# EAGLE board nutzen_04_mil (EAGLE 9.6.2), part 1 of 3
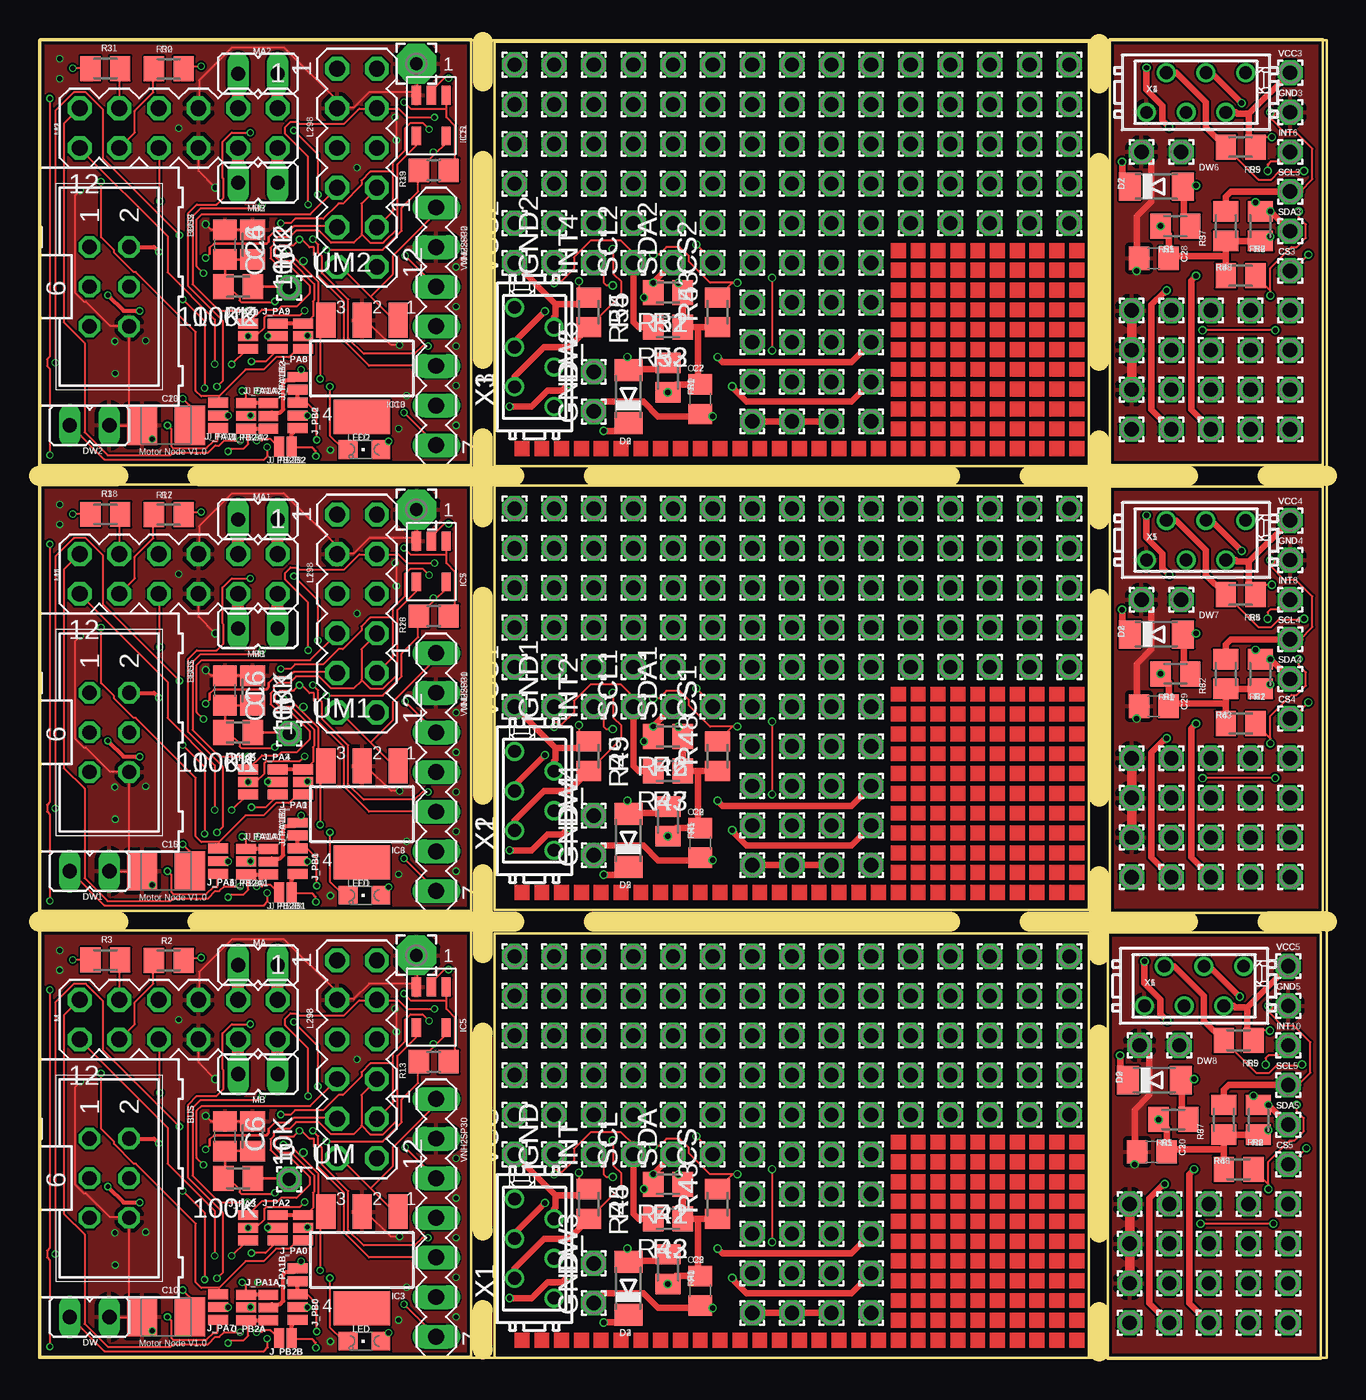
[diagram p0: board, top side]
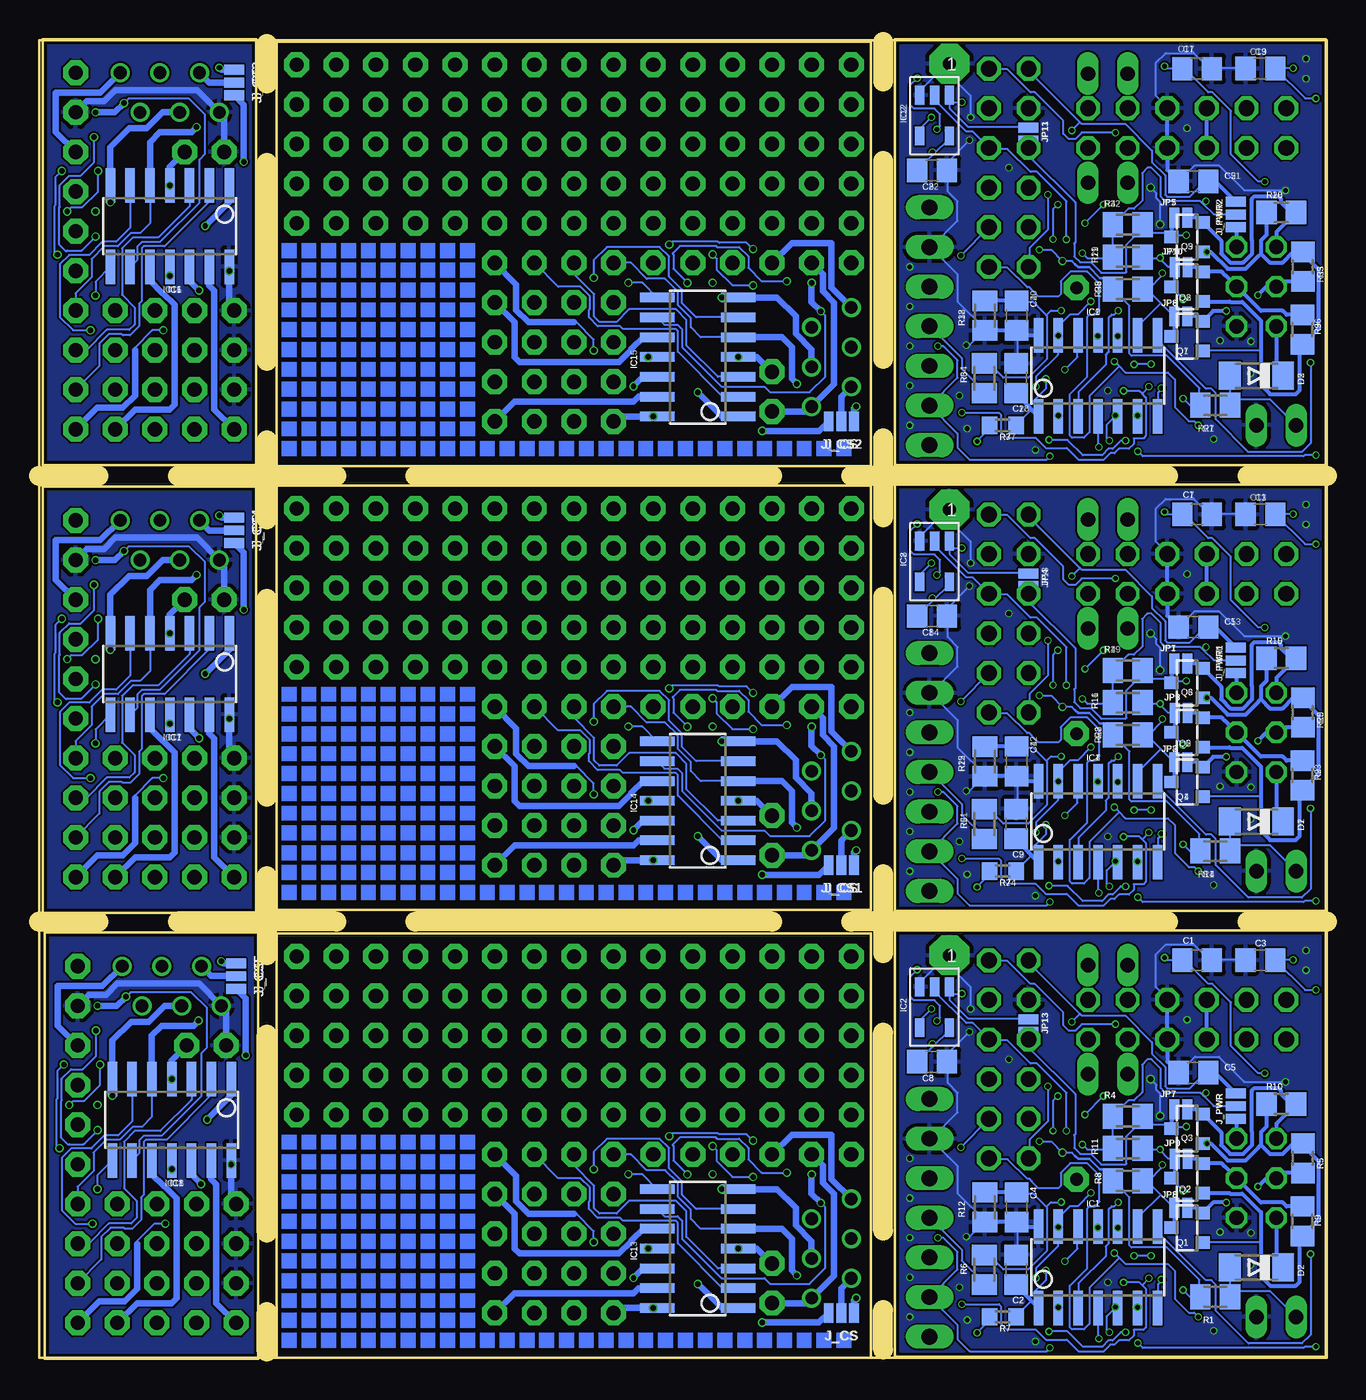
[diagram p1: board, bottom side, seen from below]

Size 82.55 x 84.58 mm. Coordinates in mm from the lower left corner, seen from the top.
Outline: 0.06,0.13 27.67,0.13 27.67,27.42 0.06,27.42 0.06,0.13
Outline: 0.06,0.13 27.69,0.13 27.69,27.43 0.06,27.43 0.06,0.13
Outline: 0.06,28.7 27.67,28.7 27.67,56 0.06,56 0.06,28.7
Outline: 0.06,28.7 27.69,28.7 27.69,56.01 0.06,56.01 0.06,28.7
Outline: 0.06,57.28 27.67,57.28 27.67,84.57 0.06,84.57 0.06,57.28
Outline: 0.06,57.28 27.69,57.28 27.69,84.58 0.06,84.58 0.06,57.28
Outline: 67.31,0.06 67.31,27.24 29.21,27.24 29.21,0.06 67.31,0.06
Outline: 67.31,28.77 67.31,55.94 29.21,55.94 29.21,28.77 67.31,28.77
Outline: 67.31,57.21 67.31,84.39 29.21,84.39 29.21,57.21 67.31,57.21
Outline: 68.64,57.28 82.3,57.28 82.3,84.58 68.64,84.58 68.64,57.28
Outline: 68.64,28.58 82.3,28.58 82.3,55.88 68.64,55.88 68.64,28.58
Outline: 68.52,0 82.17,0 82.17,27.3 68.52,27.3 68.52,0
Outline: 0,0.06 82.55,0.06 82.55,84.52 0,84.52 0,0.06
Copper layers (1*16): Top 0.035559375mm / dielectric 1.6mm / Bottom 0.035559375mm
Design rules "jlcpcb2layer": minimum track width 5mil, minimum drill 12mil, track to track 5mil, track to pad 5mil, pad to pad 5mil, via to via 5mil, smd to smd 5mil, copper to edge 8mil, drill to drill 6mil, minimum pad ring 5mil, minimum via ring 3mil, stop-mask expansion 2.5mil, vias tented up to drill 0mil, thermal gap 10mil
Net classes: 2 power: width 0.762 mm, drill 0.762 mm
Milling: 24 lines

## Footprints (pad centres in the part's own frame; a part is rotated, then mirrored left to right if it is on the bottom)
M0805 = smd 1.3 x 1.6: 1 -0.95,0; 2 0.95,0
ML6 = drill 0.914 octagon: 1 -2.54,-1.27; 2 -2.54,1.27; 3 0,-1.27; 4 0,1.27; 5 2.54,-1.27; 6 2.54,1.27
C0805 = smd 1.3 x 1.5: 1 -0.95,0; 2 0.95,0
B/3528-21R = smd 1.95 x 2.5: + 1.525,0; - -1.525,0
1,6/0,9 = drill 0.914 pad 1.6 octagon: 1 0,0
MINIMELF = smd 1.4 x 1.8: A 1.7,0; C -1.7,0
JP1 = drill 0.914 long: 1 0,-1.27; 2 0,1.27
SOIC14 = smd 0.61 x 2.21: 1 -3.81,-2.603; 2 -2.54,-2.603; 3 -1.27,-2.603; 4 0,-2.603; 5 1.27,-2.603; 6 2.54,-2.603; 7 3.81,-2.603; 8 3.81,2.603; 9 2.54,2.603; 10 1.27,2.603; 11 0,2.603; 12 -1.27,2.603; 13 -2.54,2.603; 14 -3.81,2.603
SOT-23/5 = smd 0.6 x 1.2: 1 -0.95,-1.306; 2 0,-1.306; 3 0.95,-1.306; 4 0.95,1.306; 5 -0.95,1.306
SOT223 = smd 1.219 x 2.235: 1 -2.311,-3.099; 2 0,-3.099; 3 2.311,-3.099 | smd 3.6 x 2.2: 4 0,3.099
SMT-JUMPER_3_1-NC_PASTE_NO-SILK = smd 0.635 x 1.27: 1 -0.813,0; 2 0,0; 3 0.813,0
SMT-JUMPER_2_NO_NO-SILK = smd 0.635 x 1.27: 1 -0.406,0; 2 0.406,0
SMT-JUMPER_2_NC_PASTE_NO-SILK = smd 0.635 x 1.27: 1 -0.406,0; 2 0.406,0
MA06-2 = drill 1.016 octagon: 1 -6.35,-1.27; 2 -6.35,1.27; 3 -3.81,-1.27; 4 -3.81,1.27; 5 -1.27,-1.27; 6 -1.27,1.27; 7 1.27,-1.27; 8 1.27,1.27; 9 3.81,-1.27; 10 3.81,1.27; 11 6.35,-1.27; 12 6.35,1.27
CHIPLED_0805 = smd 1.2 x 1.2: A 0,-1.05; C 0,1.05
1,6/0,8 = drill 0.813 pad 1.6 octagon: 1 0,0
2,54/0,8 = drill 0.813 pad 2.54 octagon: 1 0,0
SOT23 = smd 0.8 x 0.9: 1 -0.95,-1; 2 0.95,-1; 3 0,1
R0805 = smd 1.3 x 1.5: 1 -0.95,0; 2 0.95,0
R0603 = smd 1 x 1.1: 1 -0.85,0; 2 0.85,0
MA07-1 = drill 1.016 long: 1 -7.62,0; 2 -5.08,0; 3 -2.54,0; 4 0,0; 5 2.54,0; 6 5.08,0; 7 7.62,0
MICROMATCH-6 = drill 0.813: 1 3.175,1.27; 2 1.905,-1.27; 3 0.635,1.27; 4 -0.635,-1.27; 5 -1.905,1.27; 6 -3.175,-1.27

## Placement (x,y rotation side)
10K  10k  [M0805]  13.7,14.25 270 top
10K1  10k  [M0805]  13.7,42.82 270 top
10K2  10k  [M0805]  13.7,71.4 270 top
100K  10k  [M0805]  12.76,11.56 180 top
100K1  10k  [M0805]  12.76,40.13 180 top
100K2  10k  [M0805]  12.76,68.71 180 top
BUS  [ML6]  4.51,11.56 270 top
BUS1  [ML6]  4.51,40.13 270 top
BUS2  [ML6]  4.51,68.71 270 top
C1  1n  [C0805]  8.32,25.53 180 bottom
C2  100n  [C0805]  19.91,5.69 90 bottom
C3  1n  [C0805]  4.25,25.53 180 bottom
C4  100n  [C0805]  19.89,9.7 90 bottom
C5  0.1  [C0805]  8.55,18.31 180 bottom
C6  100n  [C0805]  11.93,14.25 270 top
C7  1n  [C0805]  8.32,54.1 180 bottom
C8  0.1  [C0805]  25.3,19.02 0 bottom
C9  100n  [C0805]  19.91,34.26 90 bottom
C10  100uF/6V  [B/3528-21R]  8.14,2.67 0 top
C11  1n  [C0805]  4.25,54.11 180 bottom
C12  100n  [C0805]  19.89,38.28 90 bottom
C13  0.1  [C0805]  8.55,46.89 180 bottom
C14  0.1  [C0805]  25.3,47.59 0 bottom
C15  100uF/6V  [B/3528-21R]  8.14,31.24 0 top
C16  100n  [C0805]  11.93,42.82 270 top
C17  1n  [C0805]  8.32,82.68 180 bottom
C18  100n  [C0805]  19.91,62.84 90 bottom
C19  1n  [C0805]  4.25,82.68 180 bottom
C20  100n  [C0805]  19.89,66.85 90 bottom
C21  0.1  [C0805]  8.55,75.46 180 bottom
C22  0.1  [C0805]  25.3,76.17 0 bottom
C23  100uF/6V  [B/3528-21R]  8.14,59.82 0 top
C24  100n  [C0805]  11.93,71.4 270 top
C25  100n  [C0805]  42.38,4.34 270 top
C26  100n  [C0805]  42.38,33.05 270 top
C27  100n  [C0805]  42.38,61.49 270 top
C28  100n  [C0805]  71.46,70.52 180 top
C29  100n  [C0805]  71.46,41.82 180 top
C30  100n  [C0805]  71.34,13.25 180 top
CS  [1,6/0,9]  43.18,13.08 90 top
CS1  [1,6/0,9]  43.18,41.78 90 top
CS2  [1,6/0,9]  43.18,70.23 90 top
CS3  [1,6/0,9]  80.2,69.72 0 top
CS4  [1,6/0,9]  80.2,41.02 0 top
CS5  [1,6/0,9]  80.07,12.45 0 top
D1  [MINIMELF]  4.51,34.42 180 bottom
D2  [MINIMELF]  4.51,5.84 180 bottom
D3  [MINIMELF]  4.51,62.99 180 bottom
D4  [MINIMELF]  37.78,4.51 90 top
D5  [MINIMELF]  37.78,33.21 90 top
D6  [MINIMELF]  37.78,61.66 90 top
D7  [MINIMELF]  71.63,75.12 0 top
D8  [MINIMELF]  71.63,46.42 0 top
D9  [MINIMELF]  71.5,17.84 0 top
DW  [JP1]  3.24,2.67 270 top
DW1  [JP1]  3.24,31.24 270 top
DW2  [JP1]  3.24,59.82 270 top
DW3  [1,6/0,9]  35.56,6.1 90 top
DW4  [1,6/0,9]  35.56,34.8 90 top
DW5  [1,6/0,9]  35.56,63.25 90 top
DW6  [1,6/0,9]  73.22,77.34 0 top
DW7  [1,6/0,9]  73.22,48.64 0 top
DW8  [1,6/0,9]  73.09,20.07 0 top
GND  [1,6/0,9]  33.02,13.08 90 top
GND1  [1,6/0,9]  33.02,41.78 90 top
GND2  [1,6/0,9]  33.02,70.23 90 top
GND3  [1,6/0,9]  80.2,79.88 0 top
GND4  [1,6/0,9]  80.2,51.18 0 top
GND5  [1,6/0,9]  80.07,22.61 0 top
GND_  [1,6/0,9]  35.56,3.56 90 top
GND_1  [1,6/0,9]  35.56,32.26 90 top
GND_2  [1,6/0,9]  35.56,60.71 90 top
GND_3  [1,6/0,9]  70.68,77.34 0 top
GND_4  [1,6/0,9]  70.68,48.64 0 top
GND_5  [1,6/0,9]  70.55,20.07 0 top
IC1  TINY84 or TINY841  [SOIC14]  14.67,5.84 0 bottom
IC2  [SOT-23/5]  25.15,22.52 180 bottom
IC3  MCP1703DB  [SOT223]  20.7,6.32 180 top
IC4  TINY84 or TINY841  [SOIC14]  14.67,34.42 0 bottom
IC5  [SOT-23/5]  25.15,22.52 180 top
IC6  MCP1703DB  [SOT223]  20.7,34.89 180 top
IC7  [SOT-23/5]  25.15,51.09 180 top
IC8  [SOT-23/5]  25.15,51.09 180 bottom
IC9  TINY84 or TINY841  [SOIC14]  14.67,62.99 0 bottom
IC10  MCP1703DB  [SOT223]  20.7,63.47 180 top
IC11  [SOT-23/5]  25.15,79.67 180 top
IC12  [SOT-23/5]  25.15,79.67 180 bottom
IC13  TINY84 or TINY841  [SOIC14]  40.32,7.05 90 bottom
IC14  TINY84 or TINY841  [SOIC14]  40.32,35.75 90 bottom
IC15  TINY84 or TINY841  [SOIC14]  40.32,64.2 90 bottom
IC16  TINY84 or TINY841  [SOIC14]  74.17,72.58 180 bottom
IC17  TINY84 or TINY841  [SOIC14]  74.17,43.88 180 bottom
IC18  TINY84 or TINY841  [SOIC14]  74.04,15.3 180 bottom
INT  [1,6/0,9]  35.56,13.08 90 top
INT0  [1,6/0,9]  45.72,13.08 90 top
INT1  [1,6/0,9]  45.72,41.78 90 top
INT2  [1,6/0,9]  35.56,41.78 90 top
INT3  [1,6/0,9]  45.72,70.23 90 top
INT4  [1,6/0,9]  35.56,70.23 90 top
INT5  [1,6/0,9]  80.2,67.18 0 top
INT6  [1,6/0,9]  80.2,77.34 0 top
INT7  [1,6/0,9]  80.2,38.48 0 top
INT8  [1,6/0,9]  80.2,48.64 0 top
INT9  [1,6/0,9]  80.07,9.91 0 top
INT10  [1,6/0,9]  80.07,20.07 0 top
J_CS  [SMT-JUMPER_3_1-NC_PASTE_NO-SILK]  31.11,2.92 180 bottom
J_CS1  [SMT-JUMPER_3_1-NC_PASTE_NO-SILK]  31.11,31.62 180 bottom
J_CS2  [SMT-JUMPER_3_1-NC_PASTE_NO-SILK]  31.11,60.07 180 bottom
J_CS3  [SMT-JUMPER_3_1-NC_PASTE_NO-SILK]  70.04,81.79 270 bottom
J_CS4  [SMT-JUMPER_3_1-NC_PASTE_NO-SILK]  70.04,53.09 270 bottom
J_CS5  [SMT-JUMPER_3_1-NC_PASTE_NO-SILK]  69.91,24.51 270 bottom
J_PA0  [SMT-JUMPER_3_1-NC_PASTE_NO-SILK]  16.93,8.38 270 top
J_PA1  [SMT-JUMPER_3_1-NC_PASTE_NO-SILK]  16.93,36.96 270 top
J_PA1A  [SMT-JUMPER_3_1-NC_PASTE_NO-SILK]  14.71,3.27 270 top
J_PA1A1  [SMT-JUMPER_3_1-NC_PASTE_NO-SILK]  14.71,31.85 270 top
J_PA1A2  [SMT-JUMPER_3_1-NC_PASTE_NO-SILK]  14.71,60.42 270 top
J_PA1B  [SMT-JUMPER_2_NO_NO-SILK]  16.57,5.37 270 top
J_PA1B1  [SMT-JUMPER_2_NO_NO-SILK]  16.57,33.94 270 top
J_PA1B2  [SMT-JUMPER_2_NO_NO-SILK]  16.57,62.52 270 top
J_PA2  [SMT-JUMPER_3_1-NC_PASTE_NO-SILK]  15.3,8.38 90 top
J_PA3  [SMT-JUMPER_3_1-NC_PASTE_NO-SILK]  13.4,8.38 90 top
J_PA4  [SMT-JUMPER_3_1-NC_PASTE_NO-SILK]  15.3,36.96 90 top
J_PA5  [SMT-JUMPER_3_1-NC_PASTE_NO-SILK]  13.4,36.96 90 top
J_PA6  [SMT-JUMPER_3_1-NC_PASTE_NO-SILK]  11.49,31.88 270 top
J_PA7  [SMT-JUMPER_3_1-NC_PASTE_NO-SILK]  11.49,3.3 270 top
J_PA8  [SMT-JUMPER_3_1-NC_PASTE_NO-SILK]  16.93,65.53 270 top
J_PA9  [SMT-JUMPER_3_1-NC_PASTE_NO-SILK]  15.3,65.53 90 top
J_PA10  [SMT-JUMPER_3_1-NC_PASTE_NO-SILK]  13.4,65.53 90 top
J_PA11  [SMT-JUMPER_3_1-NC_PASTE_NO-SILK]  11.49,60.45 270 top
J_PB0  [SMT-JUMPER_3_1-NC_PASTE_NO-SILK]  16.57,3.3 270 top
J_PB1  [SMT-JUMPER_3_1-NC_PASTE_NO-SILK]  16.57,31.88 270 top
J_PB2  [SMT-JUMPER_3_1-NC_PASTE_NO-SILK]  16.57,60.45 270 top
J_PB2A  [SMT-JUMPER_3_1-NC_PASTE_NO-SILK]  13.27,3.28 90 top
J_PB2A1  [SMT-JUMPER_3_1-NC_PASTE_NO-SILK]  13.27,31.85 90 top
J_PB2A2  [SMT-JUMPER_3_1-NC_PASTE_NO-SILK]  13.27,60.43 90 top
J_PB2B  [SMT-JUMPER_2_NO_NO-SILK]  15.8,1.31 180 top
J_PB2B1  [SMT-JUMPER_2_NO_NO-SILK]  15.8,29.88 180 top
J_PB2B2  [SMT-JUMPER_2_NO_NO-SILK]  15.8,58.46 180 top
J_PWR  [SMT-JUMPER_3_1-NC_PASTE_NO-SILK]  5.83,16.18 270 bottom
J_PWR1  [SMT-JUMPER_3_1-NC_PASTE_NO-SILK]  5.83,44.75 270 bottom
J_PWR2  [SMT-JUMPER_3_1-NC_PASTE_NO-SILK]  5.83,73.33 270 bottom
JP1  [SMT-JUMPER_2_NC_PASTE_NO-SILK]  9.36,44.55 180 bottom
JP2  [SMT-JUMPER_2_NC_PASTE_NO-SILK]  9.36,38.23 180 bottom
JP3  [SMT-JUMPER_2_NC_PASTE_NO-SILK]  9.33,41.38 180 bottom
JP4  [SMT-JUMPER_2_NO_NO-SILK]  19.14,49.91 90 bottom
JP5  [SMT-JUMPER_2_NC_PASTE_NO-SILK]  9.36,73.13 180 bottom
JP6  [SMT-JUMPER_2_NC_PASTE_NO-SILK]  9.36,66.8 180 bottom
JP7  [SMT-JUMPER_2_NC_PASTE_NO-SILK]  9.36,15.98 180 bottom
JP8  [SMT-JUMPER_2_NC_PASTE_NO-SILK]  9.36,9.65 180 bottom
JP9  [SMT-JUMPER_2_NC_PASTE_NO-SILK]  9.33,12.8 180 bottom
JP10  [SMT-JUMPER_2_NC_PASTE_NO-SILK]  9.33,69.95 180 bottom
JP11  [SMT-JUMPER_2_NO_NO-SILK]  19.14,78.49 90 bottom
JP13  [SMT-JUMPER_2_NO_NO-SILK]  19.14,21.34 90 bottom
L1  [MA06-2]  20.38,47.75 270 top
L2  [MA06-2]  20.38,76.33 270 top
L298  [MA06-2]  20.38,19.18 270 top
LED  [CHIPLED_0805]  20.87,1.12 90 top
LED1  [CHIPLED_0805]  20.87,29.69 90 top
LED2  [CHIPLED_0805]  20.87,58.27 90 top
M  [MA06-2]  8.95,21.72 180 top
M1  [MA06-2]  8.95,50.29 180 top
M2  [MA06-2]  8.95,78.87 180 top
MA  [JP1]  14.03,25.21 270 top
MA1  [JP1]  14.03,53.78 270 top
MA2  [JP1]  14.03,82.36 270 top
MB  [JP1]  14.03,18.22 90 top
MB1  [JP1]  14.03,46.8 90 top
MB2  [JP1]  14.03,75.37 90 top
P_UM  [1,6/0,8]  16.04,11.48 0 top
P_UM1  [1,6/0,8]  16.04,40.06 0 top
P_UM2  [1,6/0,8]  16.04,68.63 0 top
PA0  [1,6/0,9]  53.34,2.92 90 top
PA1  [1,6/0,9]  53.34,5.46 90 top
PA2  [1,6/0,9]  53.34,8 90 top
PA3  [1,6/0,9]  53.34,10.54 90 top
PA4  [1,6/0,9]  53.34,31.62 90 top
PA5  [1,6/0,9]  53.34,34.16 90 top
PA6  [1,6/0,9]  53.34,36.7 90 top
PA7  [1,6/0,9]  53.34,13.08 90 top
PA8  [1,6/0,9]  53.34,39.24 90 top
PA9  [1,6/0,9]  53.34,41.78 90 top
PA10  [1,6/0,9]  53.34,60.07 90 top
PA11  [1,6/0,9]  53.34,62.61 90 top
PA12  [1,6/0,9]  53.34,65.15 90 top
PA13  [1,6/0,9]  53.34,67.69 90 top
PA14  [1,6/0,9]  53.34,70.23 90 top
PA15  [1,6/0,9]  70.04,59.56 0 top
PA16  [1,6/0,9]  72.58,59.56 0 top
PA17  [1,6/0,9]  75.12,59.56 0 top
PA18  [1,6/0,9]  77.66,59.56 0 top
PA19  [1,6/0,9]  80.2,59.56 0 top
PA20  [1,6/0,9]  70.04,30.86 0 top
PA21  [1,6/0,9]  72.58,30.86 0 top
PA22  [1,6/0,9]  75.12,30.86 0 top
PA23  [1,6/0,9]  77.66,30.86 0 top
PA24  [1,6/0,9]  80.2,30.86 0 top
PA25  [1,6/0,9]  69.91,2.29 0 top
PA26  [1,6/0,9]  72.45,2.29 0 top
PA27  [1,6/0,9]  74.99,2.29 0 top
PA28  [1,6/0,9]  77.53,2.29 0 top
PA29  [1,6/0,9]  80.07,2.29 0 top
PAD1  [2,54/0,8]  24.19,25.84 0 top
PAD2  [2,54/0,8]  24.19,54.42 0 top
PAD3  [2,54/0,8]  24.19,82.99 0 top
PAD4  [1,6/0,9]  66.04,15.62 90 top
PAD5  [1,6/0,9]  66.04,18.16 90 top
PAD6  [1,6/0,9]  66.04,20.7 90 top
PAD7  [1,6/0,9]  66.04,23.24 90 top
PAD8  [1,6/0,9]  66.04,25.78 90 top
PAD9  [1,6/0,9]  63.5,25.78 90 top
PAD10  [1,6/0,9]  63.5,23.24 90 top
PAD11  [1,6/0,9]  63.5,15.62 90 top
PAD12  [1,6/0,9]  63.5,20.7 90 top
PAD13  [1,6/0,9]  63.5,18.16 90 top
PAD14  [1,6/0,9]  60.96,15.62 90 top
PAD15  [1,6/0,9]  60.96,18.16 90 top
PAD16  [1,6/0,9]  60.96,23.24 90 top
PAD17  [1,6/0,9]  60.96,20.7 90 top
PAD18  [1,6/0,9]  60.96,25.78 90 top
PAD19  [1,6/0,9]  58.42,15.62 90 top
PAD20  [1,6/0,9]  58.42,18.16 90 top
PAD21  [1,6/0,9]  58.42,20.7 90 top
PAD22  [1,6/0,9]  58.42,23.24 90 top
PAD23  [1,6/0,9]  66.04,44.32 90 top
PAD24  [1,6/0,9]  58.42,25.78 90 top
PAD25  [1,6/0,9]  55.88,15.62 90 top
PAD26  [1,6/0,9]  48.26,25.78 90 top
PAD27  [1,6/0,9]  66.04,46.86 90 top
PAD28  [1,6/0,9]  48.26,15.62 90 top
PAD29  [1,6/0,9]  48.26,20.7 90 top
PAD30  [1,6/0,9]  48.26,23.24 90 top
PAD31  [1,6/0,9]  50.8,23.24 90 top
PAD32  [1,6/0,9]  66.04,49.4 90 top
PAD33  [1,6/0,9]  48.26,18.16 90 top
PAD34  [1,6/0,9]  50.8,15.62 90 top
PAD35  [1,6/0,9]  50.8,18.16 90 top
PAD36  [1,6/0,9]  50.8,25.78 90 top
PAD37  [1,6/0,9]  53.34,15.62 90 top
PAD38  [1,6/0,9]  53.34,18.16 90 top
PAD39  [1,6/0,9]  50.8,20.7 90 top
PAD40  [1,6/0,9]  55.88,23.24 90 top
PAD41  [1,6/0,9]  66.04,51.94 90 top
PAD42  [1,6/0,9]  66.04,54.48 90 top
PAD43  [1,6/0,9]  55.88,20.7 90 top
PAD44  [1,6/0,9]  55.88,25.78 90 top
PAD45  [1,6/0,9]  53.34,25.78 90 top
PAD46  [1,6/0,9]  55.88,18.16 90 top
PAD47  [1,6/0,9]  53.34,20.7 90 top
PAD48  [1,6/0,9]  53.34,23.24 90 top
PAD49  [1,6/0,9]  45.72,15.62 90 top
PAD50  [1,6/0,9]  45.72,20.7 90 top
PAD51  [1,6/0,9]  43.18,18.16 90 top
PAD52  [1,6/0,9]  43.18,15.62 90 top
PAD53  [1,6/0,9]  45.72,25.78 90 top
PAD54  [1,6/0,9]  45.72,18.16 90 top
PAD55  [1,6/0,9]  45.72,23.24 90 top
PAD56  [1,6/0,9]  43.18,23.24 90 top
PAD57  [1,6/0,9]  43.18,20.7 90 top
PAD58  [1,6/0,9]  63.5,54.48 90 top
PAD59  [1,6/0,9]  40.64,23.24 90 top
PAD60  [1,6/0,9]  40.64,20.7 90 top
PAD61  [1,6/0,9]  40.64,18.16 90 top
PAD62  [1,6/0,9]  43.18,25.78 90 top
PAD63  [1,6/0,9]  63.5,51.94 90 top
PAD64  [1,6/0,9]  63.5,44.32 90 top
PAD65  [1,6/0,9]  38.1,18.16 90 top
PAD66  [1,6/0,9]  38.1,15.62 90 top
PAD67  [1,6/0,9]  40.64,25.78 90 top
PAD68  [1,6/0,9]  40.64,15.62 90 top
PAD69  [1,6/0,9]  38.1,20.7 90 top
PAD70  [1,6/0,9]  38.1,23.24 90 top
PAD71  [1,6/0,9]  38.1,25.78 90 top
PAD72  [1,6/0,9]  35.56,15.62 90 top
PAD73  [1,6/0,9]  63.5,49.4 90 top
PAD74  [1,6/0,9]  35.56,18.16 90 top
PAD75  [1,6/0,9]  35.56,20.7 90 top
PAD76  [1,6/0,9]  35.56,23.24 90 top
PAD77  [1,6/0,9]  63.5,46.86 90 top
PAD78  [1,6/0,9]  35.56,25.78 90 top
PAD79  [1,6/0,9]  33.02,20.7 90 top
PAD80  [1,6/0,9]  33.02,18.16 90 top
PAD81  [1,6/0,9]  33.02,23.24 90 top
PAD82  [1,6/0,9]  33.02,25.78 90 top
PAD83  [1,6/0,9]  33.02,15.62 90 top
PAD84  [1,6/0,9]  30.48,23.24 90 top
PAD85  [1,6/0,9]  30.48,20.7 90 top
PAD86  [1,6/0,9]  30.48,15.62 90 top
PAD87  [1,6/0,9]  30.48,18.16 90 top
PAD88  [1,6/0,9]  60.96,44.32 90 top
PAD89  [1,6/0,9]  45.72,5.46 90 top
PAD90  [1,6/0,9]  48.26,5.46 90 top
PAD91  [1,6/0,9]  50.8,8 90 top
PAD92  [1,6/0,9]  60.96,46.86 90 top
PAD93  [1,6/0,9]  30.48,25.78 90 top
PAD94  [1,6/0,9]  50.8,10.54 90 top
PAD95  [1,6/0,9]  48.26,10.54 90 top
PAD96  [1,6/0,9]  50.8,5.46 90 top
PAD97  [1,6/0,9]  45.72,10.54 90 top
PAD98  [1,6/0,9]  45.72,8 90 top
PAD99  [1,6/0,9]  48.26,8 90 top
PAD100  [1,6/0,9]  50.8,2.92 90 top
PAD101  [1,6/0,9]  45.72,2.92 90 top
PAD102  [1,6/0,9]  48.26,2.92 90 top
PAD103  [1,6/0,9]  60.96,51.94 90 top
PAD104  [1,6/0,9]  60.96,49.4 90 top
PAD105  [1,6/0,9]  60.96,54.48 90 top
PAD106  [1,6/0,9]  58.42,44.32 90 top
PAD107  [1,6/0,9]  58.42,46.86 90 top
PAD108  [1,6/0,9]  58.42,49.4 90 top
PAD109  [1,6/0,9]  58.42,51.94 90 top
PAD110  [1,6/0,9]  58.42,54.48 90 top
PAD111  [1,6/0,9]  55.88,44.32 90 top
PAD112  [1,6/0,9]  48.26,54.48 90 top
PAD113  [1,6/0,9]  48.26,44.32 90 top
PAD114  [1,6/0,9]  48.26,49.4 90 top
PAD115  [1,6/0,9]  48.26,51.94 90 top
PAD116  [1,6/0,9]  50.8,51.94 90 top
PAD117  [1,6/0,9]  48.26,46.86 90 top
PAD118  [1,6/0,9]  50.8,44.32 90 top
PAD119  [1,6/0,9]  50.8,46.86 90 top
PAD120  [1,6/0,9]  50.8,54.48 90 top
PAD121  [1,6/0,9]  53.34,44.32 90 top
PAD122  [1,6/0,9]  53.34,46.86 90 top
PAD123  [1,6/0,9]  50.8,49.4 90 top
PAD124  [1,6/0,9]  55.88,51.94 90 top
PAD125  [1,6/0,9]  55.88,49.4 90 top
PAD126  [1,6/0,9]  55.88,54.48 90 top
PAD127  [1,6/0,9]  53.34,54.48 90 top
PAD128  [1,6/0,9]  55.88,46.86 90 top
PAD129  [1,6/0,9]  53.34,49.4 90 top
PAD130  [1,6/0,9]  53.34,51.94 90 top
PAD131  [1,6/0,9]  45.72,44.32 90 top
PAD132  [1,6/0,9]  45.72,49.4 90 top
PAD133  [1,6/0,9]  43.18,46.86 90 top
PAD134  [1,6/0,9]  43.18,44.32 90 top
PAD135  [1,6/0,9]  45.72,54.48 90 top
PAD136  [1,6/0,9]  45.72,46.86 90 top
PAD137  [1,6/0,9]  45.72,51.94 90 top
PAD138  [1,6/0,9]  43.18,51.94 90 top
PAD139  [1,6/0,9]  43.18,49.4 90 top
PAD140  [1,6/0,9]  40.64,51.94 90 top
PAD141  [1,6/0,9]  40.64,49.4 90 top
PAD142  [1,6/0,9]  40.64,46.86 90 top
PAD143  [1,6/0,9]  43.18,54.48 90 top
PAD144  [1,6/0,9]  38.1,46.86 90 top
PAD145  [1,6/0,9]  38.1,44.32 90 top
PAD146  [1,6/0,9]  40.64,54.48 90 top
PAD147  [1,6/0,9]  40.64,44.32 90 top
PAD148  [1,6/0,9]  38.1,49.4 90 top
PAD149  [1,6/0,9]  38.1,51.94 90 top
PAD150  [1,6/0,9]  38.1,54.48 90 top
PAD151  [1,6/0,9]  35.56,44.32 90 top
PAD152  [1,6/0,9]  35.56,46.86 90 top
PAD153  [1,6/0,9]  35.56,49.4 90 top
PAD154  [1,6/0,9]  35.56,51.94 90 top
PAD155  [1,6/0,9]  35.56,54.48 90 top
PAD156  [1,6/0,9]  33.02,49.4 90 top
PAD157  [1,6/0,9]  33.02,46.86 90 top
PAD158  [1,6/0,9]  33.02,51.94 90 top
PAD159  [1,6/0,9]  33.02,54.48 90 top
PAD160  [1,6/0,9]  33.02,44.32 90 top
PAD161  [1,6/0,9]  30.48,51.94 90 top
PAD162  [1,6/0,9]  30.48,49.4 90 top
PAD163  [1,6/0,9]  30.48,44.32 90 top
PAD164  [1,6/0,9]  30.48,46.86 90 top
PAD165  [1,6/0,9]  30.48,54.48 90 top
PAD166  [1,6/0,9]  45.72,34.16 90 top
PAD167  [1,6/0,9]  48.26,34.16 90 top
PAD168  [1,6/0,9]  50.8,36.7 90 top
PAD169  [1,6/0,9]  50.8,39.24 90 top
PAD170  [1,6/0,9]  48.26,39.24 90 top
PAD171  [1,6/0,9]  50.8,34.16 90 top
PAD172  [1,6/0,9]  45.72,39.24 90 top
PAD173  [1,6/0,9]  45.72,36.7 90 top
PAD174  [1,6/0,9]  48.26,36.7 90 top
PAD175  [1,6/0,9]  50.8,31.62 90 top
PAD176  [1,6/0,9]  45.72,31.62 90 top
PAD177  [1,6/0,9]  48.26,31.62 90 top
PAD178  [1,6/0,9]  66.04,72.77 90 top
PAD179  [1,6/0,9]  66.04,75.31 90 top
PAD180  [1,6/0,9]  66.04,77.85 90 top
PAD181  [1,6/0,9]  66.04,80.39 90 top
PAD182  [1,6/0,9]  66.04,82.93 90 top
PAD183  [1,6/0,9]  63.5,82.93 90 top
PAD184  [1,6/0,9]  63.5,80.39 90 top
PAD185  [1,6/0,9]  63.5,72.77 90 top
PAD186  [1,6/0,9]  63.5,77.85 90 top
PAD187  [1,6/0,9]  63.5,75.31 90 top
PAD188  [1,6/0,9]  60.96,72.77 90 top
PAD189  [1,6/0,9]  60.96,75.31 90 top
PAD190  [1,6/0,9]  60.96,80.39 90 top
PAD191  [1,6/0,9]  60.96,77.85 90 top
PAD192  [1,6/0,9]  60.96,82.93 90 top
PAD193  [1,6/0,9]  58.42,72.77 90 top
PAD194  [1,6/0,9]  58.42,75.31 90 top
PAD195  [1,6/0,9]  58.42,77.85 90 top
PAD196  [1,6/0,9]  58.42,80.39 90 top
PAD197  [1,6/0,9]  58.42,82.93 90 top
PAD198  [1,6/0,9]  55.88,72.77 90 top
PAD199  [1,6/0,9]  48.26,82.93 90 top
PAD200  [1,6/0,9]  48.26,72.77 90 top
PAD201  [1,6/0,9]  48.26,77.85 90 top
PAD202  [1,6/0,9]  48.26,80.39 90 top
PAD203  [1,6/0,9]  50.8,80.39 90 top
PAD204  [1,6/0,9]  48.26,75.31 90 top
PAD205  [1,6/0,9]  50.8,72.77 90 top
PAD206  [1,6/0,9]  50.8,75.31 90 top
PAD207  [1,6/0,9]  50.8,82.93 90 top
PAD208  [1,6/0,9]  53.34,72.77 90 top
PAD209  [1,6/0,9]  53.34,75.31 90 top
PAD210  [1,6/0,9]  50.8,77.85 90 top
PAD211  [1,6/0,9]  55.88,80.39 90 top
PAD212  [1,6/0,9]  55.88,77.85 90 top
PAD213  [1,6/0,9]  55.88,82.93 90 top
PAD214  [1,6/0,9]  53.34,82.93 90 top
PAD215  [1,6/0,9]  55.88,75.31 90 top
PAD216  [1,6/0,9]  53.34,77.85 90 top
PAD217  [1,6/0,9]  53.34,80.39 90 top
PAD218  [1,6/0,9]  45.72,72.77 90 top
PAD219  [1,6/0,9]  45.72,77.85 90 top
PAD220  [1,6/0,9]  43.18,75.31 90 top
PAD221  [1,6/0,9]  43.18,72.77 90 top
PAD222  [1,6/0,9]  45.72,82.93 90 top
PAD223  [1,6/0,9]  45.72,75.31 90 top
PAD224  [1,6/0,9]  45.72,80.39 90 top
PAD225  [1,6/0,9]  43.18,80.39 90 top
PAD226  [1,6/0,9]  43.18,77.85 90 top
PAD227  [1,6/0,9]  40.64,80.39 90 top
PAD228  [1,6/0,9]  40.64,77.85 90 top
PAD229  [1,6/0,9]  40.64,75.31 90 top
PAD230  [1,6/0,9]  43.18,82.93 90 top
PAD231  [1,6/0,9]  38.1,75.31 90 top
PAD232  [1,6/0,9]  38.1,72.77 90 top
PAD233  [1,6/0,9]  40.64,82.93 90 top
PAD234  [1,6/0,9]  40.64,72.77 90 top
PAD235  [1,6/0,9]  38.1,77.85 90 top
PAD236  [1,6/0,9]  38.1,80.39 90 top
PAD237  [1,6/0,9]  38.1,82.93 90 top
PAD238  [1,6/0,9]  35.56,72.77 90 top
PAD239  [1,6/0,9]  35.56,75.31 90 top
PAD240  [1,6/0,9]  35.56,77.85 90 top
PAD241  [1,6/0,9]  35.56,80.39 90 top
PAD242  [1,6/0,9]  35.56,82.93 90 top
PAD243  [1,6/0,9]  33.02,77.85 90 top
PAD244  [1,6/0,9]  33.02,75.31 90 top
PAD245  [1,6/0,9]  33.02,80.39 90 top
PAD246  [1,6/0,9]  33.02,82.93 90 top
PAD247  [1,6/0,9]  33.02,72.77 90 top
PAD248  [1,6/0,9]  30.48,80.39 90 top
PAD249  [1,6/0,9]  30.48,77.85 90 top
PAD250  [1,6/0,9]  30.48,72.77 90 top
PAD251  [1,6/0,9]  30.48,75.31 90 top
PAD252  [1,6/0,9]  30.48,82.93 90 top
PAD253  [1,6/0,9]  45.72,62.61 90 top
PAD254  [1,6/0,9]  48.26,62.61 90 top
PAD255  [1,6/0,9]  50.8,65.15 90 top
PAD256  [1,6/0,9]  50.8,67.69 90 top
PAD257  [1,6/0,9]  48.26,67.69 90 top
PAD258  [1,6/0,9]  50.8,62.61 90 top
PAD259  [1,6/0,9]  45.72,67.69 90 top
PAD260  [1,6/0,9]  45.72,65.15 90 top
PAD261  [1,6/0,9]  48.26,65.15 90 top
PAD262  [1,6/0,9]  50.8,60.07 90 top
PAD263  [1,6/0,9]  45.72,60.07 90 top
PAD264  [1,6/0,9]  48.26,60.07 90 top
PAD265  [1,6/0,9]  77.66,64.64 0 top
PAD266  [1,6/0,9]  75.12,64.64 0 top
PAD267  [1,6/0,9]  75.12,62.1 0 top
PAD268  [1,6/0,9]  75.12,67.18 0 top
PAD269  [1,6/0,9]  72.58,64.64 0 top
PAD270  [1,6/0,9]  72.58,62.1 0 top
PAD271  [1,6/0,9]  77.66,67.18 0 top
PAD272  [1,6/0,9]  77.66,62.1 0 top
PAD273  [1,6/0,9]  72.58,67.18 0 top
PAD274  [1,6/0,9]  70.04,67.18 0 top
PAD275  [1,6/0,9]  70.04,64.64 0 top
PAD276  [1,6/0,9]  70.04,62.1 0 top
PAD277  [1,6/0,9]  77.66,35.94 0 top
PAD278  [1,6/0,9]  75.12,35.94 0 top
PAD279  [1,6/0,9]  75.12,33.4 0 top
PAD280  [1,6/0,9]  75.12,38.48 0 top
PAD281  [1,6/0,9]  72.58,35.94 0 top
PAD282  [1,6/0,9]  72.58,33.4 0 top
PAD283  [1,6/0,9]  77.66,38.48 0 top
PAD284  [1,6/0,9]  77.66,33.4 0 top
PAD285  [1,6/0,9]  72.58,38.48 0 top
PAD286  [1,6/0,9]  70.04,38.48 0 top
PAD287  [1,6/0,9]  70.04,35.94 0 top
PAD288  [1,6/0,9]  70.04,33.4 0 top
PAD289  [1,6/0,9]  77.53,7.37 0 top
PAD290  [1,6/0,9]  74.99,7.37 0 top
PAD291  [1,6/0,9]  74.99,4.83 0 top
PAD292  [1,6/0,9]  74.99,9.91 0 top
PAD293  [1,6/0,9]  72.45,7.37 0 top
PAD294  [1,6/0,9]  72.45,4.83 0 top
PAD295  [1,6/0,9]  77.53,9.91 0 top
PAD296  [1,6/0,9]  77.53,4.83 0 top
PAD297  [1,6/0,9]  72.45,9.91 0 top
PAD298  [1,6/0,9]  69.91,9.91 0 top
PAD299  [1,6/0,9]  69.91,7.37 0 top
PAD300  [1,6/0,9]  69.91,4.83 0 top
PB0  [1,6/0,9]  50.8,13.08 90 top
PB1  [1,6/0,9]  48.26,13.08 90 top
PB2  [1,6/0,9]  50.8,41.78 90 top
PB3  [1,6/0,9]  48.26,41.78 90 top
PB4  [1,6/0,9]  50.8,70.23 90 top
PB5  [1,6/0,9]  48.26,70.23 90 top
PB6  [1,6/0,9]  80.2,62.1 0 top
PB7  [1,6/0,9]  80.2,64.64 0 top
PB8  [1,6/0,9]  80.2,33.4 0 top
PB9  [1,6/0,9]  80.2,35.94 0 top
PB10  [1,6/0,9]  80.07,4.83 0 top
PB11  [1,6/0,9]  80.07,7.37 0 top
Q1  BSS138  [SOT23]  8.95,8.38 90 bottom
Q2  BSS138  [SOT23]  8.95,11.56 90 bottom
Q3  BSS138  [SOT23]  8.95,14.73 90 bottom
Q4  BSS138  [SOT23]  8.95,36.96 90 bottom
Q5  BSS138  [SOT23]  8.95,40.13 90 bottom
Q6  BSS138  [SOT23]  8.95,43.31 90 bottom
Q7  BSS138  [SOT23]  8.95,65.53 90 bottom
Q8  BSS138  [SOT23]  8.95,68.71 90 bottom
Q9  BSS138  [SOT23]  8.95,71.88 90 bottom
R1  10k  [M0805]  7.16,3.95 0 bottom
R2  1k  [M0805]  8.32,25.51 180 top
R3  1k  [M0805]  4.25,25.54 0 top
R4  10k  [M0805]  12.76,15.53 180 bottom
R5  10k  [R0805]  1.54,12.84 270 bottom
R6  10k  [M0805]  21.95,5.68 90 bottom
R7  1k  [R0603]  20.76,2.67 0 bottom
R8  10k  [M0805]  12.76,11.4 180 bottom
R9  10k  [R0805]  1.57,8.8 90 bottom
R10  10k  [R0805]  2.92,16.32 0 bottom
R11  10k  [M0805]  12.76,13.46 180 bottom
R12  10k  [M0805]  21.91,9.7 90 bottom
R13  10k  [R0805]  25.3,19.02 180 top
R14  10k  [M0805]  7.16,32.52 0 bottom
R15  10k  [R0805]  2.92,44.89 0 bottom
R16  10k  [M0805]  12.76,42.04 180 bottom
R17  1k  [M0805]  8.32,54.09 180 top
R18  1k  [M0805]  4.25,54.11 0 top
R19  10k  [M0805]  12.76,44.1 180 bottom
R20  10k  [R0805]  1.54,41.41 270 bottom
R21  10k  [M0805]  21.95,34.26 90 bottom
R22  10k  [M0805]  12.76,39.97 180 bottom
R23  10k  [R0805]  1.57,37.38 90 bottom
R24  1k  [R0603]  20.76,31.24 0 bottom
R25  10k  [M0805]  21.91,38.27 90 bottom
R26  10k  [R0805]  25.3,47.59 180 top
R27  10k  [M0805]  7.16,61.1 0 bottom
R28  10k  [R0805]  2.92,73.47 0 bottom
R29  10k  [M0805]  12.76,70.61 180 bottom
R30  1k  [M0805]  8.32,82.66 180 top
R31  1k  [M0805]  4.25,82.69 0 top
R32  10k  [M0805]  12.76,72.68 180 bottom
R33  10k  [R0805]  1.54,69.99 270 bottom
R34  10k  [M0805]  21.95,62.83 90 bottom
R35  10k  [M0805]  12.76,68.55 180 bottom
R36  10k  [R0805]  1.57,65.95 90 bottom
R37  1k  [R0603]  20.76,59.82 0 bottom
R38  10k  [M0805]  21.91,66.85 90 bottom
R39  10k  [R0805]  25.3,76.17 180 top
R40  10k  [M0805]  40.31,5.73 90 top
R41  10k  [M0805]  40.32,11.18 180 top
R42  10k  [M0805]  40.32,8.95 180 top
R43  10k  [M0805]  43.5,9.91 90 top
R44  10k  [M0805]  35.24,9.91 270 top
R45  10k  [M0805]  40.31,34.43 90 top
R46  10k  [M0805]  40.32,39.88 180 top
R47  10k  [M0805]  40.32,37.66 180 top
R48  10k  [M0805]  43.5,38.61 90 top
R49  10k  [M0805]  35.24,38.61 270 top
R50  10k  [M0805]  40.31,62.88 90 top
R51  10k  [M0805]  40.32,68.33 180 top
R52  10k  [M0805]  40.32,66.1 180 top
R53  10k  [M0805]  43.5,67.06 90 top
R54  10k  [M0805]  35.24,67.06 270 top
R55  10k  [M0805]  72.85,72.59 0 top
R56  10k  [M0805]  78.3,72.58 90 top
R57  10k  [M0805]  76.07,72.58 90 top
R58  10k  [M0805]  77.03,69.41 0 top
R59  10k  [M0805]  77.03,77.66 180 top
R60  10k  [M0805]  72.85,43.89 0 top
R61  10k  [M0805]  78.3,43.88 90 top
R62  10k  [M0805]  76.07,43.88 90 top
R63  10k  [M0805]  77.03,40.7 0 top
R64  10k  [M0805]  77.03,48.96 180 top
R65  10k  [M0805]  72.72,15.32 0 top
R66  10k  [M0805]  78.17,15.3 90 top
R67  10k  [M0805]  75.95,15.3 90 top
R68  10k  [M0805]  76.9,12.13 0 top
R69  10k  [M0805]  76.9,20.38 180 top
SCL  [1,6/0,9]  38.1,13.08 90 top
SCL1  [1,6/0,9]  38.1,41.78 90 top
SCL2  [1,6/0,9]  38.1,70.23 90 top
SCL3  [1,6/0,9]  80.2,74.8 0 top
SCL4  [1,6/0,9]  80.2,46.1 0 top
SCL5  [1,6/0,9]  80.07,17.53 0 top
SDA  [1,6/0,9]  40.64,13.08 90 top
SDA1  [1,6/0,9]  40.64,41.78 90 top
SDA2  [1,6/0,9]  40.64,70.23 90 top
SDA3  [1,6/0,9]  80.2,72.26 0 top
SDA4  [1,6/0,9]  80.2,43.56 0 top
SDA5  [1,6/0,9]  80.07,14.99 0 top
VCC  [1,6/0,9]  30.48,13.08 90 top
VCC1  [1,6/0,9]  30.48,41.78 90 top
VCC2  [1,6/0,9]  30.48,70.23 90 top
VCC3  [1,6/0,9]  80.2,82.42 0 top
VCC4  [1,6/0,9]  80.2,53.72 0 top
VCC5  [1,6/0,9]  80.07,25.15 0 top
VNH2SP1  [MA07-1]  25.46,37.59 270 top
VNH2SP2  [MA07-1]  25.46,66.17 270 top
VNH2SP30  [MA07-1]  25.46,9.02 270 top
X1  BUS  [MICROMATCH-6]  31.75,7.05 90 top
X2  BUS  [MICROMATCH-6]  31.75,35.75 90 top
X3  BUS  [MICROMATCH-6]  31.75,64.2 90 top
X4  BUS  [MICROMATCH-6]  74.17,81.15 0 top
X5  BUS  [MICROMATCH-6]  74.17,52.45 0 top
X6  BUS  [MICROMATCH-6]  74.04,23.88 0 top

## Library data of the parts
10K 10K1 10K2 100K 100K1 100K2 R1-R4 R6-R8 R11 R12 R14 R16-R19 R21 R22 R24 R25 R27 R29-R32 R34 R35 R37 R38 R40-R69 = rcl; SPICEPREFIX: R
BUS BUS1 BUS2 = con-harting-ml; OC_FARNELL: unknown; OC_NEWARK: unknown
C1-C30 R5 R9 R10 R13 R15 R20 R23 R26 R28 R33 R36 R39 = rcl
CS CS1-CS5 DW3-DW8 GND GND1-GND5 GND_ GND_1-GND_5 INT INT0 INT1-INT10 P_UM P_UM1 P_UM2 PA0 PA1-PA29 PAD1-PAD300 PB0 PB1-PB11 SCL SCL1-SCL5 SDA SDA1-SDA5 VCC VCC1-VCC5 = wirepad
D1-D9 = diode
DW DW1 DW2 MA MA1 MA2 MB MB1 MB2 = jumper
IC1 IC4 IC9 IC13-IC18 = avr-7
IC2 IC5 IC7 IC8 IC11 IC12 = picogate
IC3 IC6 IC10 = linear
J_CS J_CS1-J_CS5 J_PA0 J_PA1 J_PA1A J_PA1A1 J_PA1A2 J_PA1B J_PA1B1 J_PA1B2 J_PA2-J_PA11 J_PB0 J_PB1 J_PB2 J_PB2A J_PB2A1 J_PB2A2 J_PB2B J_PB2B1 J_PB2B2 J_PWR J_PWR1 J_PWR2 JP1-JP11 JP13 = SparkFun-Jumpers
L1 L2 L298 M M1 M2 VNH2SP1 VNH2SP2 VNH2SP30 = con-lstb; OC_FARNELL: unknown; OC_NEWARK: unknown
LED LED1 LED2 = led
Q1-Q9 = bss138_10; MF: Fairchild; MPN: BSS138; OC_FARNELL: 9845330; OC_NEWARK: 67R2009
X1-X6 = con-amp-micromatch; MPN: 7-215464-6; OC_FARNELL: 3784630; OC_NEWARK: 19R8125

## Nets
BUS_INT: BUS.1 JP7.1 Q3.2 R10.2
BUS_INT1: BUS1.1 JP1.1 Q6.2 R15.2
BUS_INT2: BUS2.1 JP5.1 Q9.2 R28.2
BUS_INT3: IC13.8 INT.1 R43.2 X1.1
BUS_INT4: IC14.8 INT2.1 R48.2 X2.1
BUS_INT5: IC15.8 INT4.1 R53.2 X3.1
BUS_INT6: IC16.8 INT6.1 R58.2 X4.1
BUS_INT7: IC17.8 INT8.1 R63.2 X5.1
BUS_INT8: IC18.8 INT10.1 R68.2 X6.1
BUS_P1: CS1.1 J_CS1.2 R49.2 X2.5
BUS_P2: CS2.1 J_CS2.2 R54.2 X3.5
BUS_P3: CS3.1 J_CS3.2 R59.2 X4.5
BUS_P4: CS4.1 J_CS4.2 R64.2 X5.5
BUS_P5: CS.1 J_CS.2 R44.2 X1.5
BUS_P6: CS5.1 J_CS5.2 R69.2 X6.5
BUS_RESET: BUS.5 D2.C
BUS_RESET1: BUS1.5 D1.C
BUS_RESET2: BUS2.5 D3.C
BUS_RESET3: D4.C J_CS.3
BUS_RESET4: D5.C J_CS1.3
BUS_RESET5: D6.C J_CS2.3
BUS_RESET6: D7.C J_CS3.3
BUS_RESET7: D8.C J_CS4.3
BUS_RESET8: D9.C J_CS5.3
BUS_SCL: BUS.3 JP8.1 Q1.2 R5.2
BUS_SCL1: BUS1.3 JP2.1 Q4.2 R20.2
BUS_SCL2: BUS2.3 JP6.1 Q7.2 R33.2
BUS_SCL3: IC13.9 R42.2 SCL.1 X1.3
BUS_SCL4: IC14.9 R47.2 SCL1.1 X2.3
BUS_SCL5: IC15.9 R52.2 SCL2.1 X3.3
BUS_SCL6: IC16.9 R57.2 SCL3.1 X4.3
BUS_SCL7: IC17.9 R62.2 SCL4.1 X5.3
BUS_SCL8: IC18.9 R67.2 SCL5.1 X6.3
BUS_SDA: BUS.4 JP9.1 Q2.2 R9.2
BUS_SDA1: BUS1.4 JP3.1 Q5.2 R23.2
BUS_SDA2: BUS2.4 JP10.1 Q8.2 R36.2
BUS_SDA3: IC13.7 R41.2 SDA.1 X1.4
BUS_SDA4: IC14.7 R46.2 SDA1.1 X2.4
BUS_SDA5: IC15.7 R51.2 SDA2.1 X3.4
BUS_SDA6: IC16.7 R56.2 SDA3.1 X4.4
BUS_SDA7: IC17.7 R61.2 SDA4.1 X5.4
BUS_SDA8: IC18.7 R66.2 SDA5.1 X6.4
DEBUGWIRE: D2.A DW.1 IC1.4 R1.2
DEBUGWIRE1: D1.A DW1.1 IC4.4 R14.2
DEBUGWIRE2: D3.A DW2.1 IC9.4 R27.2
DW: D4.A DW3.1 IC13.4 R40.2
DW1: D5.A DW4.1 IC14.4 R45.2
DW2: D6.A DW5.1 IC15.4 R50.2
DW3: D7.A DW6.1 IC16.4 R55.2
DW4: D8.A DW7.1 IC17.4 R60.2
DW5: D9.A DW8.1 IC18.4 R65.2
GND: 10K.1 BUS.6 C1.1 C2.2 C3.2 C4.1 C5.2 C6.1 C8.2 C10.- DW.2 IC1.14 IC2.3 IC3.2 IC5.3 L298.3 M.5 M.6 PAD1.1 R12.1 VNH2SP30.2
GND1: 10K1.1 BUS1.6 C7.1 C9.2 C11.2 C12.1 C13.2 C14.2 C15.- C16.1 DW1.2 IC4.14 IC6.2 IC7.3 IC8.3 L1.3 M1.5 M1.6 PAD2.1 R25.1 VNH2SP1.2
GND2: 10K2.1 BUS2.6 C17.1 C18.2 C19.2 C20.1 C21.2 C22.2 C23.- C24.1 DW2.2 IC9.14 IC10.2 IC11.3 IC12.3 L2.3 M2.5 M2.6 PAD3.1 R38.1 VNH2SP2.2
GND3: C25.2 GND.1 GND_.1 IC13.14 PAD100.1 PAD101.1 PAD102.1 X1.6
GND4: C26.2 GND1.1 GND_1.1 IC14.14 PAD175.1 PAD176.1 PAD177.1 X2.6
GND5: C27.2 GND2.1 GND_2.1 IC15.14 PAD262.1 PAD263.1 PAD264.1 X3.6
GND6: C28.2 GND3.1 GND_3.1 IC16.14 PAD274.1 PAD275.1 PAD276.1 X4.6
GND7: C29.2 GND4.1 GND_4.1 IC17.14 PAD286.1 PAD287.1 PAD288.1 X5.6
GND8: C30.2 GND5.1 GND_5.1 IC18.14 PAD298.1 PAD299.1 PAD300.1 X6.6
INT0: IC13.5 INT0.1 J_CS.1
INT1: IC14.5 INT1.1 J_CS1.1
INT2: IC15.5 INT3.1 J_CS2.1
INT3: IC16.5 INT5.1 J_CS3.1
INT4: IC17.5 INT7.1 J_CS4.1
INT5: IC18.5 INT9.1 J_CS5.1
INT_MISO: IC1.8 JP7.2 JP13.1 L298.5 Q3.3 R4.1
INT_MISO1: IC4.8 JP1.2 JP4.1 L1.5 Q6.3 R19.1
INT_MISO2: IC9.8 JP5.2 JP11.1 L2.5 Q9.3 R32.1
MA_A: IC2.2 J_PA0.1 J_PA2.3 L298.6 VNH2SP30.5
MA_A1: IC8.2 J_PA1.1 J_PA4.3 L1.6 VNH2SP1.5
MA_A2: IC12.2 J_PA8.1 J_PA9.3 L2.6 VNH2SP2.5
MA_B: IC2.4 J_PB0.3 J_PB2B.1 L298.4 VNH2SP30.6
MA_B1: IC8.4 J_PB1.3 J_PB2B1.1 L1.4 VNH2SP1.6
MA_B2: IC12.4 J_PB2.3 J_PB2B2.1 L2.4 VNH2SP2.6
MA_CS: R6.1 VNH2SP30.4
MA_CS1: R21.1 VNH2SP1.4
MA_CS2: R34.1 VNH2SP2.4
MA_CS_: C4.2 IC1.10 J_PA3.2 R6.2 R12.2
MA_CS_1: C12.2 IC4.10 J_PA5.2 R21.2 R25.2
MA_CS_2: C20.2 IC9.10 J_PA10.2 R34.2 R38.2
MA_E1: M.9 R3.2
MA_E1_: C3.1 J_PA1A.3 J_PB2A.1 R3.1
MA_E1_1: C11.1 J_PA1A1.3 J_PB2A1.1 R18.1
MA_E1_2: C19.1 J_PA1A2.3 J_PB2A2.1 R31.1
MA_E2: J_PA1B.2 J_PB0.1 M.11
MA_E3: M1.9 R18.2
MA_E4: J_PA1B1.2 J_PB1.1 M1.11
MA_E5: M2.9 R31.2
MA_E6: J_PA1B2.2 J_PB2.1 M2.11
MA_EN__MB_A: IC1.3 IC5.2 L298.10 VNH2SP30.3
MA_EN__MB_A1: IC4.3 IC7.2 L1.10 VNH2SP1.3
MA_EN__MB_A2: IC9.3 IC11.2 L2.10 VNH2SP2.3
MA_N [power]: M.3 MA.1
MA_N1 [power]: M1.3 MA1.1
MA_N2 [power]: M2.3 MA2.1
MA_P [power]: M.1 MA.2
MA_P1 [power]: M1.1 MA1.2
MA_P2 [power]: M2.1 MA2.2
MA_PWM: J_PA1A.1 J_PB2A.3 L298.2 VNH2SP30.7
MA_PWM1: J_PA1A1.1 J_PB2A1.3 L1.2 VNH2SP1.7
MA_PWM2: J_PA1A2.1 J_PB2A2.3 L2.2 VNH2SP2.7
MB_B: IC5.4 J_PA3.3 L298.8
MB_B1: IC7.4 J_PA5.3 L1.8
MB_B2: IC11.4 J_PA10.3 L2.8
MB_E1: M.10 R2.2
MB_E1_: C1.2 J_PA0.3 J_PA7.1 R2.1
MB_E1_1: C7.2 J_PA1.3 J_PA6.1 R17.1
MB_E1_2: C17.2 J_PA8.3 J_PA11.1 R30.1
MB_E2: J_PA3.1 M.12
MB_E3: J_PA5.1 M1.12
MB_E4: M1.10 R17.2
MB_E5: J_PA10.1 M2.12
MB_E6: M2.10 R30.2
MB_N [power]: M.4 MB.2
MB_N1 [power]: M1.4 MB1.2
MB_N2 [power]: M2.4 MB2.2
MB_P [power]: M.2 MB.1
MB_P1 [power]: M1.2 MB1.1
MB_P2 [power]: M2.2 MB2.1
MB_PWM: J_PA2.1 J_PA7.3 L298.12
MB_PWM1: J_PA4.1 J_PA6.3 L1.12
MB_PWM2: J_PA9.1 J_PA11.3 L2.12
N$1: LED1.A R24.1
N$2: 100K.1 P_UM.1
N$3: IC7.1 IC8.1 JP4.2 R26.1
N$4: IC2.1 IC5.1 JP13.2 R13.1
N$5: 100K1.1 P_UM1.1
N$6: LED.A R7.1
N$7: LED2.A R37.1
N$8: IC11.1 IC12.1 JP11.2 R39.1
N$9: 100K2.1 P_UM2.1
PA0: 10K.2 100K.2 C6.2 IC1.13 J_PA0.2 LED.C
PA1: IC1.12 J_PA1A.2 J_PA1B.1
PA2: IC1.11 J_PA2.2
PA3: 10K1.2 100K1.2 C16.2 IC4.13 J_PA1.2 LED1.C
PA4: IC4.12 J_PA1A1.2 J_PA1B1.1
PA5: IC4.11 J_PA4.2
PA6: IC4.6 J_PA6.2
PA7: IC1.6 J_PA7.2
PA8: 10K2.2 100K2.2 C24.2 IC9.13 J_PA8.2 LED2.C
PA9: IC9.12 J_PA1A2.2 J_PA1B2.1
PA10: IC9.11 J_PA9.2
PA11: IC9.6 J_PA11.2
PA12: IC13.13 PA0.1
PA13: IC13.6 PA7.1
PA14: IC13.10 PA3.1
PA15: IC13.11 PA2.1
PA16: IC13.12 PA1.1
PA17: IC14.13 PA4.1
PA18: IC14.6 PA9.1
PA19: IC14.10 PA8.1
PA20: IC14.11 PA6.1
PA21: IC14.12 PA5.1
PA22: IC15.13 PA10.1
PA23: IC15.6 PA14.1
PA24: IC15.10 PA13.1
PA25: IC15.11 PA12.1
PA26: IC15.12 PA11.1
PA27: IC16.13 PA15.1
PA28: IC16.6 PA19.1
PA29: IC16.10 PA18.1
PA30: IC16.11 PA17.1
PA31: IC16.12 PA16.1
PA32: IC17.13 PA20.1
PA33: IC17.6 PA24.1
PA34: IC17.10 PA23.1
PA35: IC17.11 PA22.1
PA36: IC17.12 PA21.1
PA37: IC18.13 PA25.1
PA38: IC18.6 PA29.1
PA39: IC18.10 PA28.1
PA40: IC18.11 PA27.1
PA41: IC18.12 PA26.1
PB0: IC1.2 J_PB0.2
PB1: IC4.2 J_PB1.2
PB2: IC1.5 J_PB2A.2 J_PB2B.2
PB3: IC4.5 J_PB2A1.2 J_PB2B1.2
PB4: IC9.2 J_PB2.2
PB5: IC9.5 J_PB2A2.2 J_PB2B2.2
PB6: IC13.3 PB1.1
PB7: IC13.2 PB0.1
PB8: IC14.3 PB3.1
PB9: IC14.2 PB2.1
PB10: IC15.3 PB5.1
PB11: IC15.2 PB4.1
PB12: IC16.3 PB7.1
PB13: IC16.2 PB6.1
PB14: IC17.3 PB9.1
PB15: IC17.2 PB8.1
PB16: IC18.3 PB11.1
PB17: IC18.2 PB10.1
SCL_SCK: IC1.9 JP8.2 L298.7 Q1.3 R8.1
SCL_SCK1: IC4.9 JP2.2 L1.7 Q4.3 R22.1
SCL_SCK2: IC9.9 JP6.2 L2.7 Q7.3 R35.1
SDA_MOSI: IC1.7 JP9.2 L298.9 Q2.3 R11.1
SDA_MOSI1: IC4.7 JP3.2 L1.9 Q5.3 R16.1
SDA_MOSI2: IC9.7 JP10.2 L2.9 Q8.3 R29.1
U1: C13.1 IC6.1 J_PWR1.1 L1.1 L1.11 VNH2SP1.1
U2: C21.1 IC10.1 J_PWR2.1 L2.1 L2.11 VNH2SP2.1
U5: C5.1 IC3.1 J_PWR.1 L298.1 L298.11 VNH2SP30.1
U_BUS: BUS.2 J_PWR.3 Q1.1 Q2.1 Q3.1 R5.1 R9.1 R10.1
U_BUS1: BUS1.2 J_PWR1.3 Q4.1 Q5.1 Q6.1 R15.1 R20.1 R23.1
U_BUS2: BUS2.2 J_PWR2.3 Q7.1 Q8.1 Q9.1 R28.1 R33.1 R36.1
VCC: C2.1 C8.1 C10.+ IC1.1 IC2.5 IC3.3 IC5.5 J_PWR.2 M.7 M.8 R1.1 R4.2 R7.2 R8.2 R11.2 R13.2
VCC1: C9.1 C14.1 C15.+ IC4.1 IC6.3 IC7.5 IC8.5 J_PWR1.2 M1.7 M1.8 R14.1 R16.2 R19.2 R22.2 R24.2 R26.2
VCC2: C18.1 C22.1 C23.+ IC9.1 IC10.3 IC11.5 IC12.5 J_PWR2.2 M2.7 M2.8 R27.1 R29.2 R32.2 R35.2 R37.2 R39.2
VCC3: C25.1 IC13.1 R40.1 R41.1 R42.1 R43.1 R44.1 VCC.1 X1.2
VCC4: C26.1 IC14.1 R45.1 R46.1 R47.1 R48.1 R49.1 VCC1.1 X2.2
VCC5: C27.1 IC15.1 R50.1 R51.1 R52.1 R53.1 R54.1 VCC2.1 X3.2
VCC6: C28.1 IC16.1 R55.1 R56.1 R57.1 R58.1 R59.1 VCC3.1 X4.2
VCC7: C29.1 IC17.1 R60.1 R61.1 R62.1 R63.1 R64.1 VCC4.1 X5.2
VCC8: C30.1 IC18.1 R65.1 R66.1 R67.1 R68.1 R69.1 VCC5.1 X6.2

## Tracks (layer width: path | path; a pad name or v marks a point on that pad's centre or on a via)
BUS_INT
  Bottom 0.254: R10.2 2.13,16.16 | 2.13,16.16 3.24,15.05 BUS.1 | 2.13,16.16 2.94,16.98 2.94,17.19 3.1,17.35 4.64,17.35 4.8,17.19 4.8,14.52 4.79,14.51 4.79,13.69 5.37,13.11 6.19,13.11 6.77,13.69 6.77,14.5 Q3.2 8.25,15.98 JP7.1
BUS_INT1
  Bottom 0.254: R15.2 2.13,44.74 | 2.13,44.74 3.24,43.63 BUS1.1 | 2.13,44.74 2.94,45.55 2.94,45.76 3.1,45.92 4.64,45.92 4.8,45.76 4.8,43.09 4.79,43.08 4.79,42.26 5.37,41.68 6.19,41.68 6.77,42.26 6.77,43.07 Q6.2 8.25,44.55 JP1.1
BUS_INT2
  Bottom 0.254: R28.2 2.13,73.31 | 2.13,73.31 3.24,72.2 BUS2.1 | 2.13,73.31 2.94,74.13 2.94,74.34 3.1,74.5 4.64,74.5 4.8,74.34 4.8,71.67 4.79,71.66 4.79,70.84 5.37,70.26 6.19,70.26 6.77,70.84 6.77,71.65 Q9.2 8.25,73.13 JP5.1
BUS_INT3  (via drill 0.35)
  Top 0.127: v39.37,13.62 39.74,13.62 40.22,14.1 41.06,14.1 41.66,13.5 41.66,13.17 43.01,11.81 v44.77,11.81 44.45,11.81 R43.2 | INT.1 36.2,12.45 36.2,11.81 36.36,11.64 v36.78,11.64
  Bottom 0.127: IC13.8 43.88,11.81 v44.77,11.81 | v39.37,13.62 39.12,13.37 39.12,12.66 38.1,11.64 v36.78,11.64
  Bottom 0.406: INT.1 34.29,14.35 31.75,14.35 31.75,11.49 X1.1
BUS_INT4  (via drill 0.35)
  Top 0.127: v39.37,42.32 39.74,42.32 40.22,42.8 41.06,42.8 41.66,42.2 41.66,41.87 43.01,40.51 v44.77,40.51 44.45,40.51 R48.2 | INT2.1 36.2,41.15 36.2,40.51 36.36,40.35 v36.78,40.35
  Bottom 0.127: IC14.8 43.88,40.51 v44.77,40.51 | v39.37,42.32 39.12,42.07 39.12,41.36 38.1,40.35 v36.78,40.35
  Bottom 0.406: INT2.1 34.29,43.05 31.75,43.05 31.75,40.2 X2.1
BUS_INT5  (via drill 0.35)
  Top 0.127: v39.37,70.77 39.74,70.77 40.22,71.25 41.06,71.25 41.66,70.65 41.66,70.32 43.01,68.96 v44.77,68.96 44.45,68.96 R53.2 | INT4.1 36.2,69.6 36.2,68.96 36.36,68.79 v36.78,68.79
  Bottom 0.127: IC15.8 43.88,68.96 v44.77,68.96 | v39.37,70.77 39.12,70.52 39.12,69.81 38.1,68.79 v36.78,68.79
  Bottom 0.406: INT4.1 34.29,71.5 31.75,71.5 31.75,68.64 X3.1
BUS_INT6  (via drill 0.35)
  Top 0.127: v80.74,73.53 80.74,73.16 81.22,72.68 81.22,71.84 80.62,71.25 80.29,71.25 78.93,69.89 v78.93,68.14 78.93,68.45 R58.2 | INT6.1 79.57,76.71 78.93,76.71 78.76,76.54 v78.76,76.12
  Bottom 0.127: IC16.8 78.93,69.02 v78.93,68.14 | v80.74,73.53 80.49,73.79 79.78,73.79 78.76,74.8 v78.76,76.12
  Bottom 0.406: INT6.1 81.47,78.61 81.47,81.15 78.61,81.15 X4.1
BUS_INT7  (via drill 0.35)
  Top 0.127: v80.74,44.83 80.74,44.46 81.22,43.98 81.22,43.14 80.62,42.54 80.29,42.54 78.93,41.19 v78.93,39.43 78.93,39.75 R63.2 | INT8.1 79.57,48.01 78.93,48.01 78.76,47.84 v78.76,47.42
  Bottom 0.127: IC17.8 78.93,40.32 v78.93,39.43 | v80.74,44.83 80.49,45.09 79.78,45.09 78.76,46.1 v78.76,47.42
  Bottom 0.406: INT8.1 81.47,49.91 81.47,52.45 78.61,52.45 X5.1
BUS_INT8  (via drill 0.35)
  Top 0.127: v80.61,16.26 80.61,15.88 81.09,15.41 81.09,14.57 80.49,13.97 80.16,13.97 78.8,12.61 v78.8,10.86 78.8,11.17 R68.2 | INT10.1 79.44,19.43 78.8,19.43 78.64,19.26 v78.64,18.84
  Bottom 0.127: IC18.8 78.8,11.75 v78.8,10.86 | v80.61,16.26 80.36,16.51 79.65,16.51 78.64,17.53 v78.64,18.84
  Bottom 0.406: INT10.1 81.34,21.34 81.34,23.88 78.49,23.88 X6.1
BUS_P1  (via drill 0.35)
  Top 0.127: R49.2 37.33,39.74 37.33,40.57 36.83,41.07 36.83,42.62 v36.78,42.67 | v42.14,42.95 43.18,41.92 CS1.1
  Top 0.406: R49.2 33.97,36.39 32.38,36.39 30.48,34.48 X2.5
  Bottom 0.127: v36.78,42.67 37.19,43.08 38.96,43.08 39.03,43.15 41.95,43.15 v42.14,42.95
  Bottom 0.406: J_CS1.2 31.11,33.21 X2.5
BUS_P2  (via drill 0.35)
  Top 0.127: R54.2 37.33,68.19 37.33,69.02 36.83,69.51 36.83,71.07 v36.78,71.12 | v42.14,71.4 43.18,70.36 CS2.1
  Top 0.406: R54.2 33.97,64.83 32.38,64.83 30.48,62.93 X3.5
  Bottom 0.127: v36.78,71.12 37.19,71.53 38.96,71.53 39.03,71.59 41.95,71.59 v42.14,71.4
  Bottom 0.406: J_CS2.2 31.11,61.66 X3.5
BUS_P3  (via drill 0.35)
  Top 0.127: R59.2 78.16,75.58 78.99,75.58 79.48,76.07 81.04,76.07 v81.09,76.12 | v81.37,70.76 80.33,69.72 CS3.1
  Top 0.406: R59.2 74.8,78.93 74.8,80.52 72.9,82.42 X4.5
  Bottom 0.127: v81.09,76.12 81.5,75.71 81.5,73.94 81.56,73.87 81.56,70.95 v81.37,70.76
  Bottom 0.406: J_CS3.2 71.63,81.79 X4.5
BUS_P4  (via drill 0.35)
  Top 0.127: R64.2 78.16,46.88 78.99,46.88 79.48,47.37 81.04,47.37 v81.09,47.42 | v81.37,42.06 80.33,41.02 CS4.1
  Top 0.406: R64.2 74.8,50.23 74.8,51.82 72.9,53.72 X5.5
  Bottom 0.127: v81.09,47.42 81.5,47.01 81.5,45.24 81.56,45.17 81.56,42.25 v81.37,42.06
  Bottom 0.406: J_CS4.2 71.63,53.09 X5.5
BUS_P5  (via drill 0.35)
  Top 0.127: R44.2 37.33,11.04 37.33,11.87 36.83,12.36 36.83,13.92 v36.78,13.97 | v42.14,14.25 43.18,13.21 CS.1
  Top 0.406: R44.2 33.97,7.68 32.38,7.68 30.48,5.78 X1.5
  Bottom 0.127: v36.78,13.97 37.19,14.38 38.96,14.38 39.03,14.44 41.95,14.44 v42.14,14.25
  Bottom 0.406: J_CS.2 31.11,4.51 X1.5
BUS_P6  (via drill 0.35)
  Top 0.127: R69.2 78.03,18.3 78.86,18.3 79.36,18.8 80.91,18.8 v80.96,18.85 | v81.24,13.48 80.21,12.45 CS5.1
  Top 0.406: R69.2 74.68,21.66 74.68,23.24 72.77,25.15 X6.5
  Bottom 0.127: v80.96,18.85 81.37,18.44 81.37,16.66 81.44,16.6 81.44,13.68 v81.24,13.48
  Bottom 0.406: J_CS5.2 71.5,24.51 X6.5
BUS_RESET
  Bottom 0.254: BUS.5 3.24,6.27 D2.C
BUS_RESET1
  Bottom 0.254: BUS1.5 3.24,34.85 D1.C
BUS_RESET2
  Bottom 0.254: BUS2.5 3.24,63.42 D3.C
BUS_RESET3  (via drill 0.35)
  Top 0.406: v36.2,2.31 37.28,2.31 D4.C
  Bottom 0.406: J_CS.3 32.54,2.31 v36.2,2.31
BUS_RESET4  (via drill 0.35)
  Top 0.406: v36.2,31.01 37.28,31.01 D5.C
  Bottom 0.406: J_CS1.3 32.54,31.01 v36.2,31.01
BUS_RESET5  (via drill 0.35)
  Top 0.406: v36.2,59.46 37.28,59.46 D6.C
  Bottom 0.406: J_CS2.3 32.54,59.46 v36.2,59.46
BUS_RESET6  (via drill 0.35)
  Top 0.406: v69.43,76.71 69.43,75.62 D7.C
  Bottom 0.406: J_CS3.3 69.43,80.36 v69.43,76.71
BUS_RESET7  (via drill 0.35)
  Top 0.406: v69.43,48.01 69.43,46.92 D8.C
  Bottom 0.406: J_CS4.3 69.43,51.66 v69.43,48.01
BUS_RESET8  (via drill 0.35)
  Top 0.406: v69.3,19.43 69.3,18.34 D9.C
  Bottom 0.406: J_CS5.3 69.3,23.09 v69.3,19.43
BUS_SCL  (via drill 0.3)
  Top 0.254: v4.41,11.02 5.42,10.01 6.19,10.01 6.2,10 v6.45,10
  Bottom 0.254: R5.2 2.91,11.89 BUS.3 3.87,11.56 v4.41,11.02 | JP8.1 8.27,9.65 Q1.2 7.29,10 v6.45,10
BUS_SCL1  (via drill 0.3)
  Top 0.254: v4.41,39.59 5.42,38.58 6.19,38.58 6.2,38.57 v6.45,38.57
  Bottom 0.254: R20.2 2.91,40.46 BUS1.3 3.87,40.13 v4.41,39.59 | JP2.1 8.27,38.23 Q4.2 7.29,38.57 v6.45,38.57
BUS_SCL2  (via drill 0.3)
  Top 0.254: v4.41,68.17 5.42,67.16 6.19,67.16 6.2,67.15 v6.45,67.15
  Bottom 0.254: R33.2 2.91,69.04 BUS2.3 3.87,68.71 v4.41,68.17 | JP6.1 8.27,66.8 Q7.2 7.29,67.15 v6.45,67.15
BUS_SCL3  (via drill 0.35)
  Top 0.127: 38.1,13.72 37.31,14.51 35.35,14.51 34.29,13.45 34.29,12.72 33.5,11.93 33.14,11.93
  Top 0.406: 38.1,13.72 SCL.1 38.1,9.27 38.42,8.95 R42.2 | 33.14,11.93 v33.02,11.8 | v32.43,9.98 30.48,8.03 X1.3
  Bottom 0.127: IC13.9 42.46,9.12 41.62,9.12 41.33,8.83 41.33,7.67 38.8,5.14 36.04,5.14 35.69,4.79 33.16,4.79 32.14,5.8 32.14,9.69 v32.43,9.98
  Bottom 0.406: v33.02,11.8 33.02,10.57 v32.43,9.98
BUS_SCL4  (via drill 0.35)
  Top 0.127: 38.1,42.42 37.31,43.21 35.35,43.21 34.29,42.15 34.29,41.42 33.5,40.63 33.14,40.63
  Top 0.406: 38.1,42.42 SCL1.1 38.1,37.97 38.42,37.66 R47.2 | 33.14,40.63 v33.02,40.5 | v32.43,38.68 30.48,36.73 X2.3
  Bottom 0.127: IC14.9 42.46,37.82 41.62,37.82 41.33,37.53 41.33,36.37 38.8,33.85 36.04,33.85 35.69,33.49 33.16,33.49 32.14,34.51 32.14,38.39 v32.43,38.68
  Bottom 0.406: v33.02,40.5 33.02,39.27 v32.43,38.68
BUS_SCL5  (via drill 0.35)
  Top 0.127: 38.1,70.87 37.31,71.66 35.35,71.66 34.29,70.6 34.29,69.87 33.5,69.08 33.14,69.08
  Top 0.406: 38.1,70.87 SCL2.1 38.1,66.42 38.42,66.1 R52.2 | 33.14,69.08 v33.02,68.95 | v32.43,67.13 30.48,65.18 X3.3
  Bottom 0.127: IC15.9 42.46,66.27 41.62,66.27 41.33,65.98 41.33,64.82 38.8,62.29 36.04,62.29 35.69,61.94 33.16,61.94 32.14,62.95 32.14,66.84 v32.43,67.13
  Bottom 0.406: v33.02,68.95 33.02,67.72 v32.43,67.13
BUS_SCL6  (via drill 0.35)
  Top 0.127: 80.83,74.8 81.63,75.6 81.63,77.55 80.56,78.61 79.84,78.61 79.05,79.4 79.05,79.76
  Top 0.406: 80.83,74.8 SCL3.1 76.39,74.8 76.07,74.49 R57.2 | 79.05,79.76 v78.92,79.88 | v77.1,80.47 75.14,82.42 X4.3
  Bottom 0.127: IC16.9 76.24,70.45 76.24,71.29 75.95,71.58 74.79,71.58 72.26,74.1 72.26,76.86 71.91,77.21 71.91,79.74 72.92,80.76 76.81,80.76 v77.1,80.47
  Bottom 0.406: v78.92,79.88 77.69,79.88 v77.1,80.47
BUS_SCL7  (via drill 0.35)
  Top 0.127: 80.83,46.1 81.63,46.89 81.63,48.85 80.56,49.91 79.84,49.91 79.05,50.7 79.05,51.06
  Top 0.406: 80.83,46.1 SCL4.1 76.39,46.1 76.07,45.78 R62.2 | 79.05,51.06 v78.92,51.18 | v77.1,51.77 75.14,53.72 X5.3
  Bottom 0.127: IC17.9 76.24,41.74 76.24,42.59 75.95,42.88 74.79,42.88 72.26,45.4 72.26,48.16 71.91,48.51 71.91,51.04 72.92,52.06 76.81,52.06 v77.1,51.77
  Bottom 0.406: v78.92,51.18 77.69,51.18 v77.1,51.77
BUS_SCL8  (via drill 0.35)
  Top 0.127: 80.71,17.53 81.5,18.32 81.5,20.27 80.44,21.34 79.71,21.34 78.92,22.13 78.92,22.48
  Top 0.406: 80.71,17.53 SCL5.1 76.26,17.53 75.95,17.21 R67.2 | 78.92,22.48 v78.79,22.61 | v76.97,23.19 75.02,25.15 X6.3
  Bottom 0.127: IC18.9 76.11,13.17 76.11,14.01 75.82,14.3 74.66,14.3 72.14,16.83 72.14,19.58 71.78,19.94 71.78,22.47 72.8,23.48 76.68,23.48 v76.97,23.19
  Bottom 0.406: v78.79,22.61 77.56,22.61 v76.97,23.19
BUS_SDA
  Bottom 0.254: R9.2 2.57,9.75 2.83,10.01 4.23,10.01 BUS.4 6.51,12.29 6.53,12.29 6.74,12.51 Q2.2 8.25,12.8 JP9.1
BUS_SDA1
  Bottom 0.254: R23.2 2.57,38.33 2.83,38.58 4.23,38.58 BUS1.4 6.51,40.87 6.53,40.87 6.74,41.08 Q5.2 8.25,41.38 JP3.1
BUS_SDA2
  Bottom 0.254: R36.2 2.57,66.9 2.83,67.16 4.23,67.16 BUS2.4 6.51,69.44 6.53,69.44 6.74,69.66 Q8.2 8.25,69.95 JP10.1
BUS_SDA3  (via drill 0.35)
  Top 0.127: v39.37,11.81 R41.2 39.05,10.86 v38.78,10.86
  Top 0.406: v39.37,11.81 SDA.1
  Bottom 0.127: IC13.7 v38.78,10.86
  Bottom 0.406: IC13.7 35.24,10.86 34.04,9.65 34.04,8.53 33.02,7.52 X1.4
BUS_SDA4  (via drill 0.35)
  Top 0.127: v39.37,40.51 R46.2 39.05,39.56 v38.78,39.56
  Top 0.406: v39.37,40.51 v39.37,40.52 SDA1.1
  Bottom 0.127: IC14.7 v38.78,39.56
  Bottom 0.406: IC14.7 35.24,39.56 34.04,38.35 34.04,37.23 33.02,36.22 X2.4
BUS_SDA5  (via drill 0.35)
  Top 0.127: v39.37,68.96 R51.2 39.05,68.01 v38.78,68.01
  Top 0.406: v39.37,68.96 SDA2.1
  Bottom 0.127: IC15.7 v38.78,68.01
  Bottom 0.406: IC15.7 35.24,68.01 34.04,66.8 34.04,65.68 33.02,64.67 X3.4
BUS_SDA6  (via drill 0.35)
  Top 0.127: v78.93,73.53 R56.2 77.98,73.85 v77.98,74.12
  Top 0.406: v78.93,73.53 SDA3.1
  Bottom 0.127: IC16.7 v77.98,74.12
  Bottom 0.406: IC16.7 77.98,77.66 76.77,78.87 75.65,78.87 74.64,79.88 X4.4
BUS_SDA7  (via drill 0.35)
  Top 0.127: v78.93,44.83 R61.2 77.98,45.15 v77.98,45.42
  Top 0.406: v78.93,44.83 SDA4.1
  Bottom 0.127: IC17.7 v77.98,45.42
  Bottom 0.406: IC17.7 77.98,48.96 76.77,50.17 75.65,50.17 74.64,51.18 X5.4
BUS_SDA8  (via drill 0.35)
  Top 0.127: v78.8,16.25 R66.2 77.85,16.57 v77.85,16.84
  Top 0.406: v78.8,16.25 v78.81,16.25 SDA5.1
  Bottom 0.127: IC18.7 v77.85,16.84
  Bottom 0.406: IC18.7 77.85,20.38 76.64,21.59 75.53,21.59 74.51,22.61 X6.4
DEBUGWIRE  (via drill 0.3)
  Top 0.127: DW.1 2.02,2.64 4.18,0.48 14.43,0.48 14.67,0.71 14.67,1.23 v14.62,1.28
  Bottom 0.127: 6.21,4.32 6.21,5.78 D2.A | 6.21,4.32 6.21,3.97 R1.2 6.21,4.32 | 6.21,4.32 3.63,4.32 2.02,2.71 DW.1 | IC1.4 14.67,1.33 v14.62,1.28
DEBUGWIRE1  (via drill 0.3)
  Top 0.127: DW1.1 2.02,31.22 4.18,29.05 14.43,29.05 14.67,29.29 14.67,29.8 v14.62,29.85
  Bottom 0.127: 6.21,32.89 6.21,34.36 D1.A | 6.21,32.89 6.21,32.54 R14.2 6.21,32.89 | 6.21,32.89 3.63,32.89 2.02,31.29 DW1.1 | IC4.4 14.67,29.9 v14.62,29.85
DEBUGWIRE2  (via drill 0.3)
  Top 0.127: DW2.1 2.02,59.79 4.18,57.63 14.43,57.63 14.67,57.86 14.67,58.38 v14.62,58.43
  Bottom 0.127: 6.21,61.47 6.21,62.93 D3.A | 6.21,61.47 6.21,61.12 R27.2 6.21,61.47 | 6.21,61.47 3.63,61.47 2.02,59.86 DW2.1 | IC9.4 14.67,58.48 v14.62,58.43
DW  (via drill 0.35)
  Top 0.406: D4.A 37.72,6.27 | 37.72,6.27 IC13.4 | R40.2 39.9,6.27 37.72,6.27
  Bottom 0.406: DW3.1 36.51,7.05 IC13.4
  other vias: 37.72,7.05
DW1  (via drill 0.35)
  Top 0.406: D5.A 37.72,34.97 | 37.72,34.97 IC14.4 | R45.2 39.9,34.97 37.72,34.97
  Bottom 0.406: DW4.1 36.51,35.75 IC14.4
  other vias: 37.72,35.75
DW2  (via drill 0.35)
  Top 0.406: D6.A 37.72,63.42 | 37.72,63.42 IC15.4 | R50.2 39.9,63.42 37.72,63.42
  Bottom 0.406: DW5.1 36.51,64.2 IC15.4
  other vias: 37.72,64.2
DW3  (via drill 0.35)
  Top 0.406: D7.A 73.39,75.18 | 73.39,75.18 IC16.4 | R55.2 73.39,73 73.39,75.18
  Bottom 0.406: DW6.1 74.17,76.39 IC16.4
  other vias: 74.17,75.18
DW4  (via drill 0.35)
  Top 0.406: D8.A 73.39,46.48 | 73.39,46.48 IC17.4 | R60.2 73.39,44.3 73.39,46.48
  Bottom 0.406: DW7.1 74.17,47.69 IC17.4
  other vias: 74.17,46.48
DW5  (via drill 0.35)
  Top 0.406: D9.A 73.26,17.91 | 73.26,17.91 IC18.4 | R65.2 73.26,15.72 73.26,17.91
  Bottom 0.406: DW8.1 74.04,19.11 IC18.4
  other vias: 74.04,17.91
GND  (via drill 0.3, 0.35)
  Top 0.127: IC3.2 20.95,9.42 22.55,7.81 v23.11,7.81 | 5.79,2.64 4.53,2.64 DW.2 | 5.79,2.64 6.56,2.64 C10.- | 5.79,2.64 5.79,9 BUS.6 5.72,9.07 4.53,9.07 3,10.6 2.86,10.6 2.3,11.16 2.3,17.38 v2.65,17.73 | 5.79,2.64 C10.- | 24.23,24.02 24.23,25.83 PAD1.1 | 24.23,24.02 24.23,23.88 IC5.3 24.23,24.02 | 24.23,24.02 21.16,24.02 20.18,23.04 19.13,23.04 L298.3 19.06,23.04 19.06,23.53 15.71,26.88 12.36,26.88 10.26,24.78 10.26,23.04 M.5 | v22.9,20.94 22.9,22.34 v22.84,22.41 | C10.- 7.25,2.03 v7.25,1.78 | v11.29,17.91 10.22,18.98 M.6
  Top 0.15: 10K.1 C6.1 11.04,15.2 v10.68,15.55
  Bottom 0.127: C2.2 19.83,6.76 19.83,8.16 19.62,8.37 C4.1 | v23.11,7.81 22.9,7.81 22,8.72 R12.1 21.93,8.86 23.67,10.6 23.67,12.35 25.42,14.1 VNH2SP30.2 25.35,14.1 23.67,15.77 23.67,17.03 24.3,17.66 24.3,18.99 C8.2 24.3,19.06 24.3,19.55 v22.9,20.94 | C3.2 5.23,25.55 7.33,25.55 C1.1 7.4,25.55 7.54,25.55 8.52,26.53 10.33,26.53 10.96,25.9 10.96,23.81 10.26,23.11 M.5 | IC2.3 26.05,23.88 26.05,24.16 24.37,25.83 24.23,25.83 PAD1.1 24.58,25.55 22.84,23.81 v22.84,22.41 | v2.65,17.73 5.3,17.73 6.91,19.34 8.45,19.34 9.42,18.36 C5.2 | v10.68,15.55 10.68,16.98 10.92,17.22 10.92,17.54 v11.29,17.91
  Bottom 0.254: M.5 M.6 10.22,19.04 C5.2 | IC1.14 19.59,8.45 C4.1 R12.1
  other vias: 4.89,5.99 4.86,8.05 6.85,8.1 1.33,24.89 1.33,26.16 8.95,21.72 20.38,19.18 26.73,12.83 26.73,10.29 26.73,7.75 26.73,5.21 26.73,2.67 14.03,4.89 18.68,1.09 23.05,2.46 23.56,4.57
  pour Top: 0.06,0.13 27.69,0.13 27.69,27.43 0.06,27.43
  pour Bottom: 0.06,0.13 27.69,0.13 27.69,27.43 0.06,27.43
GND1  (via drill 0.3, 0.35)